# EAGLE board dreamshellbios (EAGLE 8.2.2)
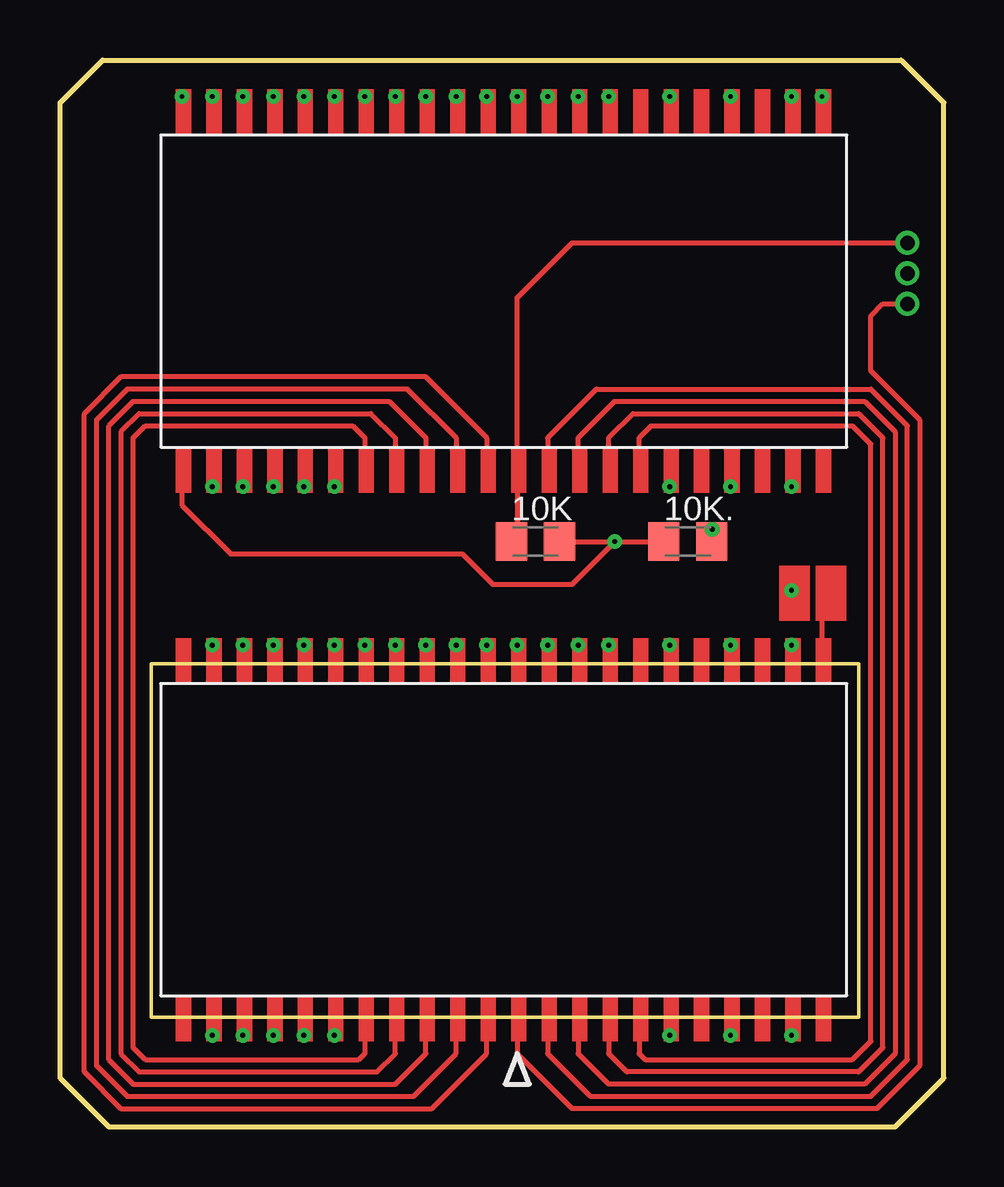
[diagram p0: board, top side]
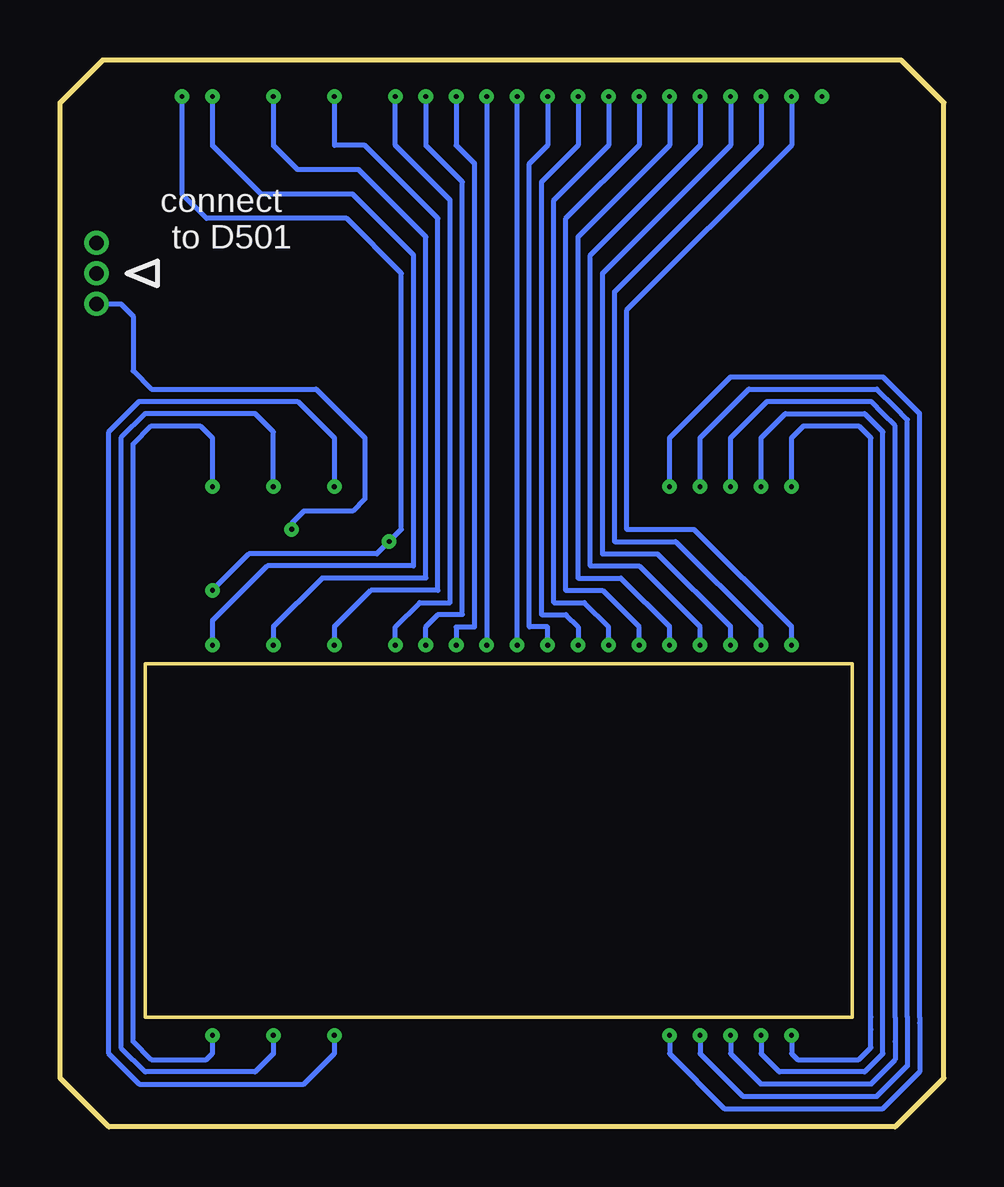
[diagram p1: board, bottom side, seen from below]

Size 36.83 x 44.45 mm. Coordinates in mm from the lower left corner, seen from the top.
Outline: 0,2.03 2.03,0 34.8,0 36.83,2.03 36.83,42.67 35.05,44.45 1.78,44.45 0,42.67 0,2.03
Outline: 3.81,4.57 3.81,19.3 33.27,19.3 33.27,4.57 3.81,4.57
Copper layers (1*16): Top 0.035mm / dielectric 1.5mm / Bottom 0.035mm
Design rules "default *": minimum track width 6mil, minimum drill 0.35mm, track to track 6mil, track to pad 6mil, pad to pad 6mil, via to via 6mil, smd to smd 6mil, copper to edge 4mil, drill to drill 1mil, minimum pad ring 10mil, minimum via ring 8mil, stop-mask expansion 1mil, vias tented up to drill 10mil, thermal gap 10mil

## Footprints (pad centres in the part's own frame; a part is rotated, then mirrored left to right if it is on the bottom)
C0805K = smd 1.3 x 1.6: 1 -1,0; 2 1,0

## Placement (x,y rotation side)
10K  [C0805K]  19.81,24.38 0 top
10K.  [C0805K]  26.16,24.38 0 top
E$2  [SOIC44]  4.83,5.46 0 top
E$3  [SOIC44]  4.83,28.32 0 top

## Library data of the parts
10K 10K. = resistor
E$2 E$3 = dp_devices

## Tracks (layer width: path | path; a pad name or v marks a point on that pad's centre or on a via)
P1
  Top 0.203: 5.08,26.92 5.08,25.91 7.11,23.88 12.45,23.88
S$1  (via drill 0.6)
  Top 0.203: 19.05,3.81 19.05,3.05 21.34,0.76 34.04,0.76 35.81,2.54 35.81,29.46 33.78,31.5 33.78,33.78 34.29,34.29 v35.31,34.29
  Bottom 0.203: v35.31,34.29 34.29,34.29 33.78,33.78 33.78,31.5 33.02,30.73 26.16,30.73 24.13,28.7 24.13,26.16 24.64,25.65 26.67,25.65 27.18,25.15 27.18,24.89
S$2
  Top 0.203: 31.75,19.81 31.75,21.59
S$3
  Top 0.203: 19.05,26.67 19.05,24.89
S$5
  Top 0.203: 21.08,24.38 24.89,24.38
S$6  (via drill 0.2 pad 0.05)
  Bottom 0.203: 30.48,22.35 28.96,23.88 23.62,23.88 22.61,24.89 22.61,35.56 24.89,37.85 30.73,37.85 31.75,38.86 v31.75,42.93
S$7  (via drill 0.2 pad 0.05)
  other vias: 5.08,42.93
S$8  (via drill 0.6)
  Top 0.203: 19.05,27.94 19.05,34.54 21.34,36.83 v35.31,36.83
S$9  (via drill 0.2 pad 0.05)
  Top 0.203: v23.11,24.38 21.34,22.61 18.03,22.61 16.76,23.88 12.45,23.88
S$10  (via drill 0.6)
  other vias: 35.31,35.56
S$11  (via drill 0.2 pad 0.05)
  other vias: 27.18,24.89
S$23  (via drill 0.2 pad 0.05)
  Bottom 0.203: v6.35,3.81 6.35,3.05 6.1,2.79 3.56,2.79 3.05,3.3 3.05,4.06 3.05,4.57 3.05,28.7 3.3,28.96 3.56,29.21 5.84,29.21 6.35,28.7 v6.35,26.67
S$25  (via drill 0.2 pad 0.05)
  Bottom 0.203: v8.89,3.81 8.89,3.05 7.62,1.78 3.05,1.78 2.03,2.79 2.03,3.56 2.03,4.57 2.03,29.21 2.54,29.72 3.05,30.23 7.37,30.23 8.89,28.7 v8.89,26.67
S$28  (via drill 0.2 pad 0.05)
  Bottom 0.203: v7.62,3.81 7.62,3.05 6.86,2.29 3.3,2.29 2.54,3.05 2.54,28.96 3.05,29.46 3.3,29.72 6.6,29.72 7.62,28.7 v7.62,26.67
S$45  (via drill 0.2 pad 0.05)
  Bottom 0.203: v11.43,3.81 11.43,3.05 9.14,0.76 2.54,0.76 1.02,2.29 1.02,4.32 1.02,4.57 1.02,29.72 1.27,29.97 2.54,31.24 8.89,31.24 11.43,28.7 v11.43,26.67
S$47  (via drill 0.2 pad 0.05)
  Bottom 0.203: v30.48,3.81 30.48,3.05 30.73,2.79 33.02,2.79 33.78,3.56 33.78,28.45 33.02,29.21 30.99,29.21 30.48,28.7 v30.48,26.67
S$49  (via drill 0.2 pad 0.05)
  Bottom 0.203: v25.4,3.81 25.4,3.05 26.67,1.78 33.53,1.78 34.8,3.05 34.8,28.96 33.53,30.23 26.92,30.23 25.4,28.7 v25.4,26.67
S$51  (via drill 0.2 pad 0.05)
  Bottom 0.203: v30.48,20.07 30.48,21.08 28.19,23.37 22.1,23.37 22.1,36.32 24.64,38.86 28.45,38.86 30.48,40.89 v30.48,42.93
  other vias: 30.48,22.35
S$52  (via drill 0.2 pad 0.05)
  Bottom 0.203: v27.94,20.07 27.94,20.83 25.91,22.86 21.59,22.86 21.59,37.08 24.38,39.88 26.92,39.88 27.94,40.89 v27.94,42.93
S$53  (via drill 0.2 pad 0.05)
  Bottom 0.203: v25.4,20.07 25.4,20.83 23.88,22.35 21.08,22.35 21.08,37.85 24.13,40.89 25.4,40.89 v25.4,42.93
S$54  (via drill 0.2 pad 0.05)
  Bottom 0.203: v22.86,20.07 22.86,20.83 21.84,21.84 20.57,21.84 20.57,38.61 22.86,40.89 v22.86,42.93
S$56  (via drill 0.2 pad 0.05)
  Bottom 0.203: v6.35,20.07 6.35,20.83 10.41,24.89 13.21,24.89 13.21,34.04 6.35,40.89 v6.35,42.93
S$57  (via drill 0.2 pad 0.05)
  Bottom 0.203: v7.62,20.07 7.62,20.83 11.18,24.38 13.72,24.38 13.72,34.8 7.62,40.89 v7.62,42.93
S$58  (via drill 0.2 pad 0.05)
  Bottom 0.203: v8.89,20.07 8.89,20.83 11.94,23.88 14.22,23.88 14.22,35.56 8.89,40.89 v8.89,42.93
S$59  (via drill 0.2 pad 0.05)
  Bottom 0.203: v10.16,20.07 10.16,20.83 12.7,23.37 14.73,23.37 14.73,36.32 10.16,40.89 v10.16,42.93
S$60  (via drill 0.2 pad 0.05)
  Bottom 0.203: v11.43,20.07 11.43,20.83 13.46,22.86 15.24,22.86 15.24,37.08 11.43,40.89 11.43,42.67
S$61  (via drill 0.2 pad 0.05)
  Bottom 0.203: v12.7,20.07 12.7,20.83 14.22,22.35 15.75,22.35 15.75,37.85 12.7,40.89 v12.7,42.93
S$62  (via drill 0.2 pad 0.05)
  Bottom 0.203: v13.97,20.07 13.97,20.83 14.99,21.84 16.26,21.84 16.26,38.61 13.97,40.89 v13.97,42.93
S$63  (via drill 0.2 pad 0.05)
  Bottom 0.203: v15.24,20.07 15.24,20.83 15.75,21.34 16.76,21.34 16.76,39.37 15.24,40.89 v15.24,42.93
S$64  (via drill 0.2 pad 0.05)
  Bottom 0.203: v16.51,20.07 16.51,20.83 17.27,20.83 17.27,40.13 16.51,40.89 v16.51,42.93
S$65  (via drill 0.2 pad 0.05)
  Bottom 0.203: v17.78,20.07 v17.78,42.93
S$67  (via drill 0.2 pad 0.05)
  Bottom 0.203: v20.32,20.07 20.32,20.83 19.56,20.83 19.56,40.13 20.32,40.89 v20.32,42.93
S$73
  Top 0.203: 22.86,4.06 22.86,3.05 23.62,2.29 33.27,2.29 34.29,3.3 34.29,28.7 33.27,29.72 23.88,29.72 22.86,28.7 22.86,27.94
S$75  (via drill 0.2 pad 0.05)
  Bottom 0.203: v21.59,20.07 21.59,20.83 21.08,21.34 20.07,21.34 20.07,39.37 21.59,40.89 v21.59,42.93
S$77  (via drill 0.2 pad 0.05)
  Bottom 0.203: v10.16,3.81 10.16,3.05 8.38,1.27 2.79,1.27 1.52,2.54 1.52,4.06 1.52,4.57 1.52,29.46 2.03,29.97 2.79,30.73 8.13,30.73 10.16,28.7 v10.16,26.67
S$79  (via drill 0.2 pad 0.05)
  Bottom 0.203: v27.94,26.67 27.94,28.96 28.7,29.72 33.27,29.72 34.29,28.7 34.29,4.06 34.29,3.3 33.27,2.29 28.7,2.29 27.94,3.05 v27.94,3.81
S$80
  Top 0.203: 12.7,3.81 12.7,3.05 12.45,2.79 3.56,2.79 3.05,3.3 3.05,28.7 3.56,29.21 12.19,29.21 12.7,28.7 12.7,27.94
S$91
  Top 0.203: 20.32,3.81 20.32,3.05 22.1,1.27 33.78,1.27 35.31,2.79 35.31,29.21 33.78,30.73 22.35,30.73 20.32,28.7 20.32,27.94
S$101  (via drill 0.2 pad 0.05)
  other vias: 11.43,42.93
S$107  (via drill 0.2 pad 0.05)
  Bottom 0.203: v19.05,42.93 v19.05,20.07
S$115
  Top 0.203: 16.51,26.67 16.76,26.92
S$122
  Top 0.203: 13.97,27.94 13.97,28.7 12.95,29.72 3.3,29.72 2.54,28.96 2.54,3.05 3.3,2.29 13.21,2.29 13.97,3.05 13.97,3.81
S$123
  Top 0.203: 15.24,27.69 15.24,28.7 13.72,30.23 3.05,30.23 2.03,29.21 2.03,2.79 3.05,1.78 13.97,1.78 15.24,3.05 15.24,3.81
S$124
  Top 0.203: 16.51,27.94 16.51,28.7 14.48,30.73 2.79,30.73 1.52,29.46 1.52,2.54 2.79,1.27 14.73,1.27 16.51,3.05 16.51,3.81 16.76,4.06
S$125
  Top 0.203: 17.78,27.94 17.78,28.7 15.24,31.24 2.54,31.24 1.02,29.72 1.02,2.29 2.54,0.76 15.49,0.76 17.78,3.05 17.78,4.06
S$128
  Top 0.203: 21.59,28.19 21.59,28.7 23.11,30.23 33.53,30.23 34.8,28.96 34.8,3.05 33.53,1.78 22.86,1.78 21.59,3.05 21.59,3.81
S$130
  Top 0.203: 24.13,27.69 24.13,28.7 24.64,29.21 33.02,29.21 33.78,28.45 33.78,3.56 33.02,2.79 24.38,2.79 24.13,3.05 24.13,4.06
(copper drawn outside any net)
  shapes: Top area x2

## Text on the board
bNames: connect / to D501